# Allegro board DM_SENSOR.brd
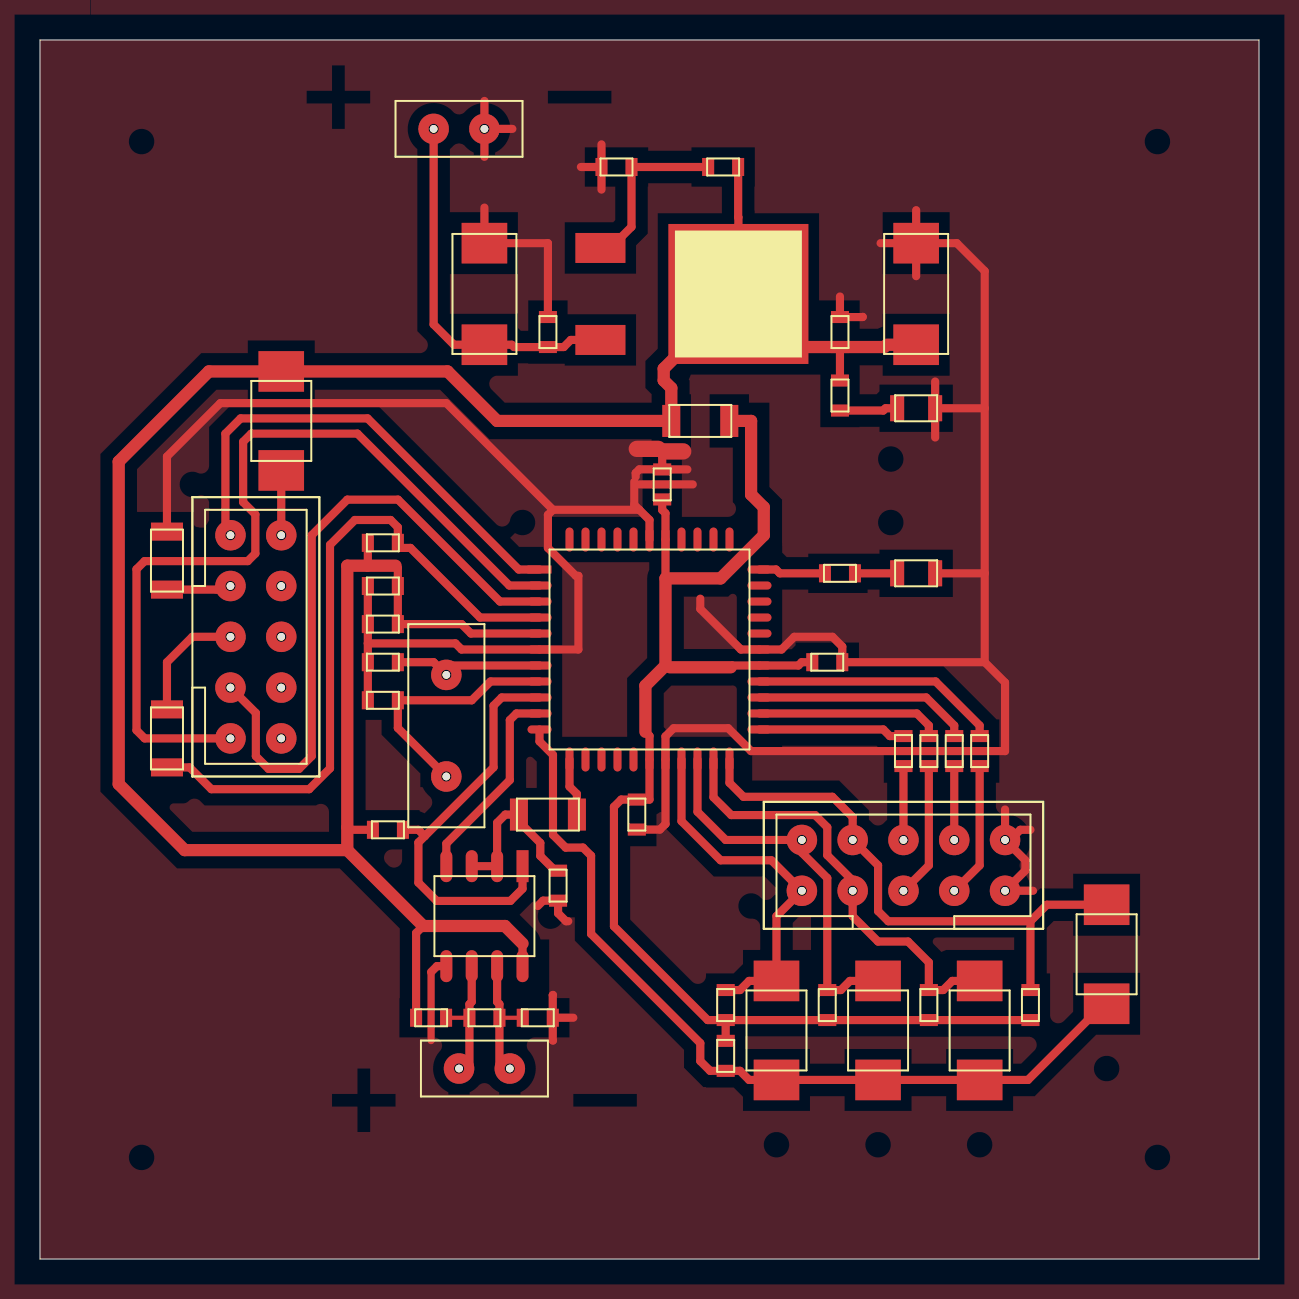
[diagram p0: board, top side]
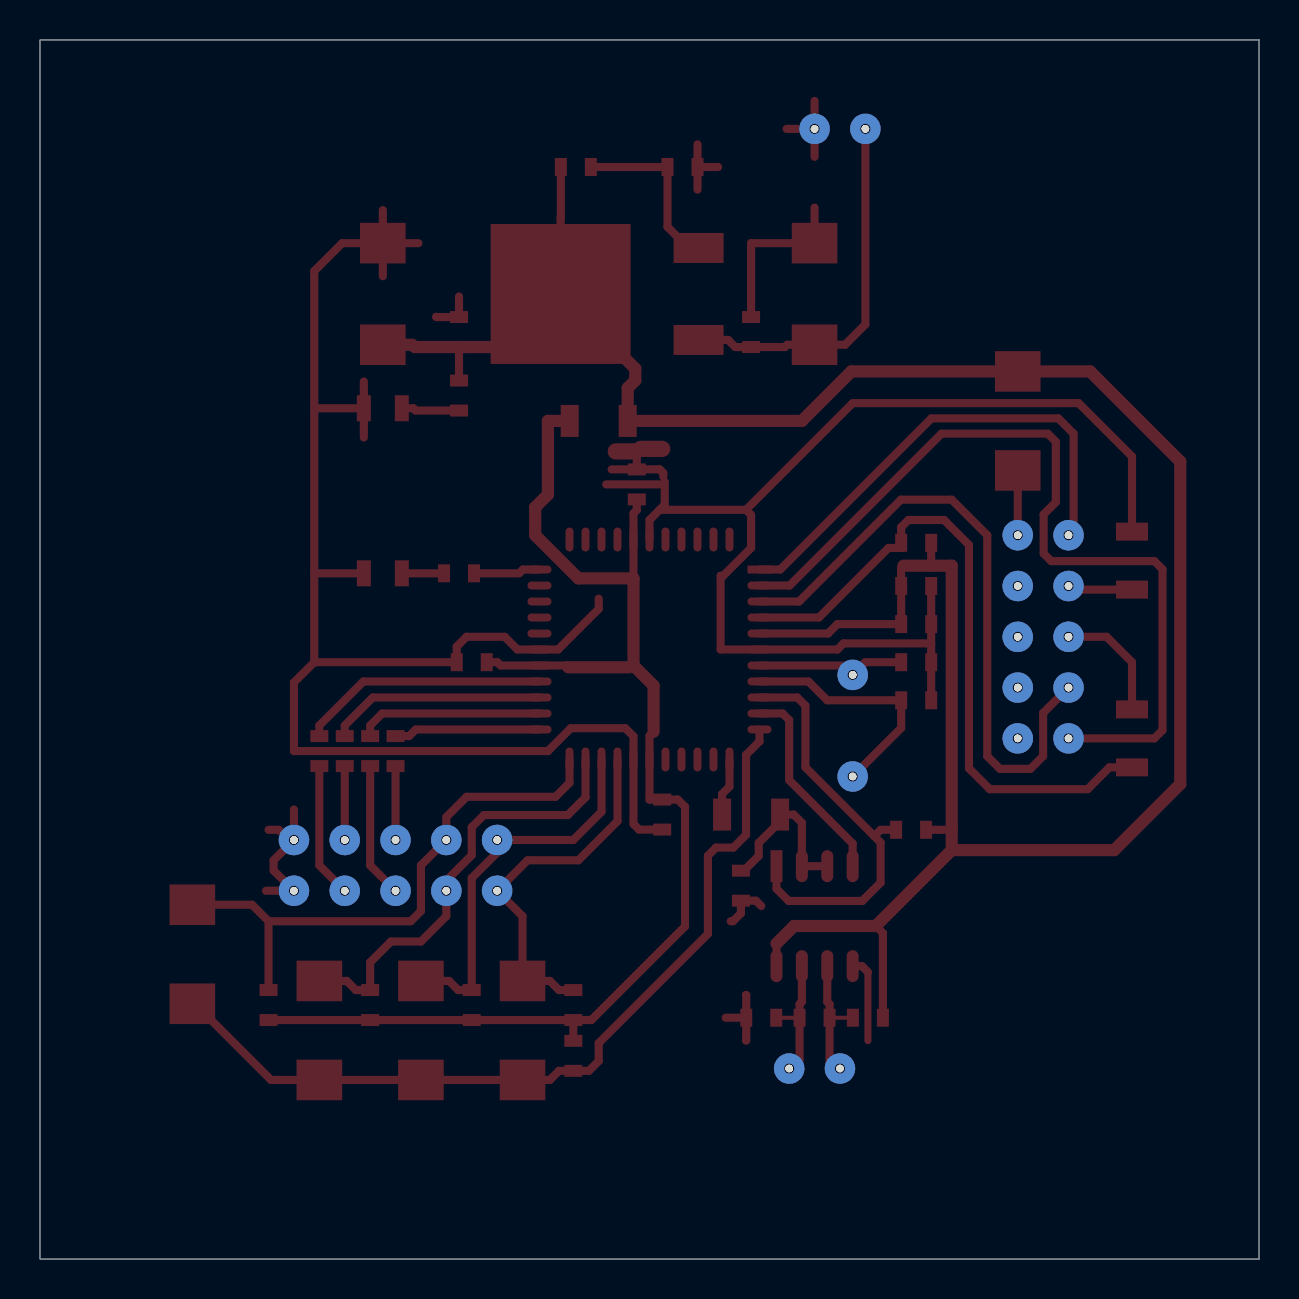
[diagram p1: board, bottom side, seen from below]

Outline 60.96 x 60.96 mm; copper layers: TOP, BOTTOM. Coordinates in mm from the lower left corner of the outline.
Outline path: 0,60.96 0,0 60.96,0 60.96,60.96 0,60.96

## Design rules (mm)
nets with their own width: min track width 0.406; nets GND VCC

## Placement (name value [footprint] x y rotation side)
C1  0.1  [FP_C_SM0603]  25.4 46.35 270 top
C2  4.7x16V  [FP_C_SM_TANTALUM_C]  22.22 48.26 90 top
C3  4.7x16V  [FP_C_SM_TANTALUM_C]  43.81 48.26 90 top
C4  0.1  [FP_C_SM0603]  40 46.35 270 top
C5  24pF  [FP_C_SM0603]  17.14 29.84 0 top
C6  24pF  [FP_C_SM0603]  17.14 27.94 0 top
C7  0.1  [FP_C_SM0603]  17.14 33.65 0 top
C8  0.1  [FP_C_SM0603]  17.14 31.75 0 top
C9  0.1  [FP_C_SM0603]  29.84 22.22 90 top
C10  0.1  [FP_C_SM0603]  39.37 29.84 180 top
C11  0.1  [FP_C_SM0603]  31.11 38.73 270 top
D1  1N4148  [FP_D_1N4148_SM]  12.06 41.91 90 top
D6  1N4148  [FP_D_1N4148_SM]  36.83 11.43 90 top
D7  1N4148  [FP_D_1N4148_SM]  41.91 11.43 90 top
D8  1N4148  [FP_D_1N4148_SM]  46.99 11.43 90 top
D9  1N4148  [FP_D_1N4148_SM]  53.34 15.24 90 top
D10  LED  [FP_D_LED_SM0805]  43.81 42.54 0 top
D11  LED  [FP_D_LED_SM0805]  43.81 34.29 0 top
J1  USBASP  [FP_J_AVR_USB_ASP]  10.79 31.11 0 top
J2  CON10  [FP_J_CON10]  43.18 19.69 90 top
JP2  "485"  [FP_JP_JUMPER_DIP2]  22.22 9.52 90 top
JP3  "POWER"  [FP_JP_JUMPER_DIP2]  20.95 56.51 90 top
PS1  LD1117DTTR  [FP_PS_LD1117DTTR]  34.92 48.26 270 top
R1  180  [FP_R_SM0603]  34.16 54.61 0 top
R2  510  [FP_R_SM0603]  28.83 54.61 180 top
R3  10K  [FP_R_SM0603]  17.14 35.81 180 top
R4  0  [FP_R_SM1206]  25.4 22.22 0 top
R5  10K  [FP_R_SM0603]  34.29 12.7 270 top
R6  10K  [FP_R_SM0603]  39.37 12.7 270 top
R7  10K  [FP_R_SM0603]  44.45 12.7 270 top
R8  10K  [FP_R_SM0603]  49.53 12.7 270 top
R9  680  [FP_R_SM0603]  44.45 25.4 90 top
R10  680  [FP_R_SM0603]  43.18 25.4 90 top
R11  680  [FP_R_SM0603]  46.99 25.4 90 top
R12  680  [FP_R_SM0603]  45.72 25.4 90 top
R13  10K  [FP_R_SM0603]  34.29 10.16 90 top
R14  0  [FP_R_SM1206]  33.02 41.91 0 top
R15  0  [FP_R_SM1206]  6.35 34.92 270 top
R16  0  [FP_R_SM1206]  6.35 26.03 90 top
R17  1K  [FP_R_SM0603]  40 43.18 90 top
R18  1K  [FP_R_SM0603]  40 34.29 180 top
R19  390  [FP_R_SM0603]  19.56 12.06 180 top
R20  220  [FP_R_SM0603]  22.22 12.06 180 top
R21  390  [FP_R_SM0603]  24.89 12.06 180 top
R22  10K  [FP_R_SM0603]  25.91 18.67 270 top
R23  10K  [FP_R_SM0603]  17.4 21.46 180 top
U1  ATMEGA32L-8AU  [FP_U_ATMEGA32L-8AU]  30.48 30.48 0 top
U2  ADM1485ARZ  [FP_U_ADM1485ARZ]  22.22 17.14 270 top
Y1  7.372800 MHz  [FP_Y_CRYSTAL]  20.32 26.67 0 top

## Library data of the parts
C1 C4-C11 = C sm 0603
C2 C3 = C sm tantalum size C
D1 D6-D9 = D 1N4148 sm
D10 D11 = D LED sm 0805
J1 = J AVR USB ASP
J2 = J Connector 10
JP2 JP3 = JP Jumper DIP2
PS1 = PS LD1117DTTR
R1-R3 R5-R13 R17-R23 = R sm 0603
R4 R14-R16 = R sm 1206
U1 = U ATMEGA32L-8AU
U2 = U ADM1485ARZ
Y1 = Y Crystal

## Footprints (pads in the part's own frame, mm; a bottom-side part is the same pattern mirrored in y, then rotated)
FP_C_SM0603
  rect 0.6x0.9 smd: 1(-0.75,0) 2(0.75,0)
FP_C_SM_TANTALUM_C
  rect 2.03x2.28 smd: 1(-2.54,0) 2(2.54,0)
FP_D_1N4148_SM
  rect 2.03x2.28 smd: 1(-2.476,0) 2(2.476,0)
FP_D_LED_SM0805
  rect 0.7x1.3 smd: 1(-0.95,0) 2(0.95,0)
FP_J_AVR_USB_ASP
  custom 1.524x1.524 hole 0.406: 1(-1.27,5.08) 2(1.27,5.08) 3(-1.27,2.54) 4(1.27,2.54) 5(-1.27,0) 6(1.27,0) 7(-1.27,-2.54) 8(1.27,-2.54) 9(-1.27,-5.08) 10(1.27,-5.08)
FP_J_CON10
  custom 1.524x1.524 hole 0.406: 1(-1.27,5.08) 2(1.27,5.08) 3(-1.27,2.54) 4(1.27,2.54) 5(-1.27,0) 6(1.27,0) 7(-1.27,-2.54) 8(1.27,-2.54) 9(-1.27,-5.08) 10(1.27,-5.08)
FP_JP_JUMPER_DIP2
  custom 1.524x1.524 hole 0.406: 1(0,1.27) 2(0,-1.27)
FP_PS_LD1117DTTR
  rect 1.5x2.5 smd: 1(-2.3,-6.9) 3(2.3,-6.9)
  rect 7x7 smd: 4(0,0)
FP_R_SM0603
  rect 0.6x0.9 smd: 1(-0.75,0) 2(0.75,0)
FP_R_SM1206
  rect 0.9x1.6 smd: 1(-1.45,0) 2(1.45,0)
FP_U_ADM1485ARZ
  rect 1.6x0.6 smd: 1(-2.5,1.905)
  oval 1.6x0.6 smd: 2(-2.5,0.635) 3(-2.5,-0.635) 4(-2.5,-1.905) 5(2.5,-1.905) 6(2.5,-0.635) 7(2.5,0.635) 8(2.5,1.905)
FP_U_ATMEGA32L-8AU
  rect 1.2x0.4 smd: 1(-5.5,4)
  oval 1.2x0.4 smd: 2(-5.5,3.2) 3(-5.5,2.4) 4(-5.5,1.6) 5(-5.5,0.8) 6(-5.5,0) 7(-5.5,-0.8) 8(-5.5,-1.6) 9(-5.5,-2.4) 10(-5.5,-3.2) 11(-5.5,-4) 23(5.5,-4) 24(5.5,-3.2) 25(5.5,-2.4) 26(5.5,-1.6) 27(5.5,-0.8) 28(5.5,0) 29(5.5,0.8) 30(5.5,1.6) 31(5.5,2.4) 32(5.5,3.2) 33(5.5,4)
  oval 0.4x1.2 smd: 12(-4,-5.5) 13(-3.2,-5.5) 14(-2.4,-5.5) 15(-1.6,-5.5) 16(-0.8,-5.5) 17(0,-5.5) 18(0.8,-5.5) 19(1.6,-5.5) 20(2.4,-5.5) 21(3.2,-5.5) 22(4,-5.5) 34(4,5.5) 35(3.2,5.5) 36(2.4,5.5) 37(1.6,5.5) 38(0.8,5.5) 39(0,5.5) 40(-0.8,5.5) 41(-1.6,5.5) 42(-2.4,5.5) 43(-3.2,5.5) 44(-4,5.5)
FP_Y_CRYSTAL
  custom 1.524x1.524 hole 0.406: 1(0,2.54) 2(0,-2.54)

## Nets
GND: C1.1 C2.2 C3.2 C4.1 C5.1 C6.1 C7.1 C8.1 C9.1 C10.1 C11.1 D10.2(CATHODE) D11.2(CATHODE) J1.3(GND#3) J1.4(GND#4) J1.6(GND#6) J1.8(GND#8) J1.10(GND#10) J2.9 J2.10 JP3.2 R2.2 R15.1 R15.2 R21.1 R22.2 U1.6(GND#6) U1.18(GND#18) U1.28(GND#28) U1.39(GND#39) U2.5(GND)
VCC: C3.1 C4.2 C7.2 C8.2 C9.2 C10.2 C11.2 D1.2(CATHODE) PS1.4(OUT) R1.2 R3.2 R5.2 R6.2 R7.2 R8.2 R13.2 R14.1 R14.2 R17.2 R19.2 R23.2 U1.5(VCC#5) U1.17(VCC#17) U1.27(AVCC) U1.38(VCC#38) U2.8(VCC)
VIN: C1.2 C2.1 JP3.1 PS1.3(IN)
A: JP2.1 R19.1 R20.2 U2.6(A)
AREF: U1.29(AREF)
B: JP2.2 R20.1 R21.2 U2.7(B)
BOARD_LED: R18.2 U1.33(PA4 (ADC4))
BUT0: D6.2(CATHODE) J2.1 R5.1 U1.19(PC0 (SCL))
BUT1: D7.2(CATHODE) J2.2 R6.1 U1.20(PC1 (SDA))
BUT2: D8.2(CATHODE) J2.3 R7.1 U1.21(PC2 (TCK))
BUT3: D9.2(CATHODE) J2.4 R8.1 U1.22(PC3 (TMS))
INT0: D6.1(ANODE) D7.1(ANODE) D8.1(ANODE) D9.1(ANODE) R13.1 U1.11(PD2 (INT0))
LED0: R9.2 U1.24(PC5 (TDI))
LED1: R10.2 U1.23(PC4 (TDO))
LED2: R11.2 U1.26(PC7 (TOSC2))
LED3: R12.2 U1.25(PC6 (TOSC1))
MISO: J1.9(MISO) U1.2(PB6 (MISO))
MOSI: J1.1(MOSI) U1.1(PB5 (MOSI))
NREDE: R4.2 U1.12(PD3 (INT1))
NRST: J1.5(RESET) R3.1 R16.1 R16.2 U1.4(NRESET)
PB0 (XCK/T0): U1.40(PB0 (XCK/T0))
PB1 (T1): U1.41(PB1 (T1))
PB2 (AIN0/INT2): U1.42(PB2 (AIN0/INT2))
PB3 (AIN1/OC0): U1.43(PB3 (AIN1/OC0))
PB4 (NSS): U1.44(PB4 (NSS))
RXD: R23.1 U1.9(PD0 (RXD)) U2.1(RO)
SCK: J1.7(SCK) U1.3(PB7 (SCK))
TXD: U1.10(PD1 (TXD)) U2.4(DI)
XTAL1: C6.2 U1.8(XTAL1) Y1.2
XTAL2: C5.2 U1.7(XTAL2) Y1.1
N06039: R4.1 R22.1 U2.2(NRE) U2.3(DE)
N07188: D1.1(ANODE) J1.2(VCC)
N12106: J2.5 R9.1
N12110: J2.6 R10.1
N12114: J2.7 R11.1
N12118: J2.8 R12.1
N22855: D10.1(ANODE) R17.1
N23161: D11.1(ANODE) R18.1
N27727: PS1.1(ADJ) R1.1 R2.1

Pads without a net: U1 13 14 15 16 30 31 32 34 35 36 37

## Routing (per net, layer and track width the routed paths; a pad name or vN(x,y) marks a point on that pad's centre or on a via; arc(x,y) is an arc through that point)
GND: length 183.5
  TOP w0.356: 19.56,10.92 19.56,14.35
  TOP w0.406: 25.65,10.92 25.64,10.93 R21.1 ; 25.65,37.46 29.97,37.46 ; 25.65,37.46 20.32,42.8 9.02,42.8 6.35,40.13 R15.1 ; 25.65,37.46 25.4,37.21 25.4,35.56 26.8,34.16 26.92,34.16 26.92,30.48 U1.6 21.08,30.48 20.78,30.78 16.39,30.78 ; 29.97,37.46 30.48,36.96 U1.39 ; 29.97,37.46 29.72,37.72 29.72,38.87 ; D10.2 44.76,41.08 ; D10.2 44.76,43.88 ; D10.2 47.24,42.54 ; 16.39,30.78 C5.1 C6.1 ; 16.39,30.78 C8.1 C7.1 ; R21.1 25.64,13.2 25.65,13.21 ; R21.1 26.67,12.06 ; 26.42,16.89 26.31,16.89 25.91,17.29 R22.2 25.16,17.92 24.89,17.65 ; 31.11,39.64 C11.1 ; 31.11,39.64 30.96,39.49 ; 31.11,39.64 31.27,39.49 ; 31.11,39.64 31.11,40.31 30.91,40.51 ; C11.1 31.27,39.49 ; C11.1 30.96,39.49 ; 47.24,42.54 47.24,49.4 45.85,50.8 C3.2 ; 47.24,42.54 47.24,34.29 ; C9.1 31,21.47 31.28,21.76 U1.18 31.28,26.14 31.69,26.54 34.42,26.54 35.56,25.4 48.26,25.4 48.26,28.83 47.24,29.84 ; R15.2 8.84,33.47 9.02,33.65 ; 48.64,18.8 49.28,19.43 49.28,19.94 48.64,20.57 ; 30.96,39.49 30.96,39.49 29.97,39.49 29.79,39.31 29.79,39.12 ; R2.2 28.08,55.74 ; R2.2 27.05,54.61 ; R2.2 28.08,53.48 ; 47.24,34.29 D11.2 ; 47.24,34.29 47.24,29.84 ; C3.2 42.04,50.8 ; C3.2 43.81,49.15 ; C3.2 43.81,52.45 ; 40,48.13 C4.1 41.14,47.11 41.15,47.12 ; 22.22,57.02 22.22,57.91 ; 22.22,52.58 C2.2 25.4,50.8 C1.1 ; 31.27,39.49 32.37,39.49 ; 33.02,33.02 33.02,32.51 35.05,30.48 U1.28 37.08,30.48 37.72,31.11 39.63,31.11 40.12,30.63 C10.1 47.24,29.84 ; U2.5 19.85,14.64 19.56,14.35 ; 22.73,56.51 23.62,56.51 ; 48.77,18.41 49.66,18.41 ; 48.77,21.21 49.02,21.46 49.53,21.46 ; 48.26,21.46 48.26,22.48 ; 29.97,38.73 32.64,38.73 ; 22.22,56.01 22.22,55.12
  TOP w0.813: 29.84,40.51 30.91,40.51 ; 31.19,40.39 32.17,40.39
VCC: length 199.2
  TOP w0.406: 31.5,29.59 31.41,29.68 31.28,29.68 31.28,29.68 ; R5.2 R13.2 ; R5.2 33.39,11.95 28.7,16.64 28.7,22.61 29.06,22.98 C9.2 30.48,22.98 U1.17 30.48,26.16 30.28,26.37 ; R5.2 R6.2 R7.2 R8.2 ; 17.78,34.67 17.9,34.56 C7.2 C8.2 21.08,31.75 21.55,31.28 U1.5 ; U2.8 24.13,15.78 ; 19.16,16.65 18.81,16.3 R19.2 ; 16.38,34.67 16.39,34.68 R3.2 ; C4.2 R17.2 ; 34.54,29.59 34.63,29.68 U1.27 37.93,29.68 38.09,29.84 C10.2 ; 37.58,45.6 PS1.4 34.92,52.09 34.91,52.1 R1.2 ; C11.2 31.11,37.46 31.28,37.29 U1.38 31.28,34.04 ; 42.34,45.72 42.23,45.6 ; 15.37,21.59 15.49,21.46 R23.2
  TOP w0.61: 30.28,26.37 30.28,28.67 31.28,29.68 ; 24.13,15.78 23.25,16.65 19.16,16.65 15.37,20.45 ; 15.37,20.45 15.37,34.67 17.78,34.67 ; 15.37,20.45 7.24,20.45 3.94,23.75 3.94,39.88 8.44,44.39 D1.2 20.38,44.39 22.86,41.91 R14.1 31.57,43.56 31.19,43.94 31.19,44.53 PS1.4 ; 37.58,45.6 C4.2 42.23,45.6 ; 34.54,29.59 31.5,29.59 ; C3.1 42.34,45.72 ; 31.28,29.68 31.28,34.04 34.04,34.04 36.19,36.19 36.19,37.59 35.56,38.23 35.56,41.91 R14.2
VIN: length 18.2
  TOP w0.406: PS1.3 26.55,45.96 26.19,45.6 C1.2 23.71,45.6 23.59,45.72 C2.1 20.7,45.72 19.68,46.74 19.68,56.01
A: length 6.1
  TOP w0.203: R19.1 R20.2
  TOP w0.406: U2.6 21.59,12.86 21.47,12.74 R20.2 21.47,9.73
B: length 6.1
  TOP w0.203: R20.1 R21.2
  TOP w0.406: U2.7 22.86,12.86 22.98,12.74 R20.1 22.98,9.73
BOARD_LED: length 3.4
  TOP w0.406: R18.2 37,34.29 36.81,34.48 U1.33
BUT0: length 17.2
  TOP w0.406: 37.72,18.8 36.58,19.94 34.04,19.94 32.08,21.9 U1.19 ; R5.1 35.01,13.45 35.46,13.91 D6.2 36.83,17.14 37.72,18.03
BUT1: length 18.2
  TOP w0.406: U1.20 32.88,22.36 34.29,20.95 37.59,20.95 ; D7.2 40.5,13.91 40.05,13.45 R6.1 39.37,19.05 38.1,20.32 38.1,20.45
BUT2: length 21
  TOP w0.406: D8.2 45.62,13.91 45.17,13.45 R7.1 44.45,14.83 43.41,15.88 41.91,15.88 40.64,17.14 40.64,17.91 ; 40.64,18.92 39.37,20.19 39.37,21.59 38.76,22.2 34.57,22.2 33.68,23.09 U1.21
BUT3: length 27.6
  TOP w0.406: U1.22 34.48,23.81 35.18,23.11 39.62,23.11 40.64,22.1 40.64,21.46 ; 49.53,16.89 42.42,16.89 41.91,17.4 41.91,19.69 41.02,20.57 ; 49.53,16.89 R8.1 ; 49.53,16.89 50.35,17.72 D9.2
INT0: length 42.7
  TOP w0.406: D9.1 53.22,12.76 49.41,8.95 D8.1 D7.1 D6.1 35.46,8.95 35.01,9.41 R13.1 33.51,9.41 33.02,9.9 33.02,10.79 27.56,16.26 27.56,20.17 27.15,20.57 26.29,20.57 25.65,21.21 25.65,25.21 24.98,25.88 U1.11
LED0: length 9.2
  TOP w0.406: U1.24 43.85,27.28 44.45,26.68 R9.2
LED1: length 7.3
  TOP w0.406: R10.2 42.5,26.15 42.17,26.48 U1.23
LED2: length 12.5
  TOP w0.406: U1.26 44.79,28.88 46.99,26.68 R11.2
LED3: length 10.8
  TOP w0.406: R12.2 45.72,26.68 44.32,28.08 U1.25
MISO: length 42.7
  TOP w0.406: 9.02,26.03 5.23,26.03 4.83,26.44 4.83,34.49 5.23,34.9 10.39,34.9 10.77,35.28 10.77,37.24 10.16,37.85 10.16,40.87 10.57,41.27 15.88,41.27 23.47,33.68 U1.2
MOSI: length 23.9
  TOP w0.406: U1.1 23.94,34.48 16.38,42.04 10.03,42.04 9.27,41.27 9.27,36.58
NREDE: length 2.9
  TOP w0.406: R4.2 26.85,23.25 26.48,23.62 U1.12
NRST: length 39.4
  TOP w0.406: U1.4 22.01,32.08 18.53,35.56 17.9,35.56 R3.1 17.9,36.59 17.53,36.96 15.75,36.96 14.5,35.71 14.5,24.54 13.46,23.5 8.57,23.5 7.48,24.58 R16.1 ; 9.02,31.11 7.62,31.11 6.35,29.84 R16.2
RXD: length 21.1
  TOP w0.406: R23.1 18.92,21.46 19.24,21.15 ; U2.1 24.13,18.51 23.52,17.91 19.84,17.91 18.92,18.82 18.92,20.83 19.24,21.15 ; U1.9 23.09,28.08 22.68,27.67 22.68,24.59 19.24,21.15
SCK: length 32
  TOP w0.406: 9.91,28.19 10.79,27.3 10.79,25.15 11.43,24.51 12.95,24.51 13.59,25.15 13.59,36.19 15.37,37.97 17.91,37.97 23,32.88 U1.3
TXD: length 10.2
  TOP w0.406: U1.10 23.83,27.28 23.49,26.95 23.49,23.95 20.32,20.78 U2.4
XTAL1: length 11.7
  TOP w0.406: U1.8 22.53,28.88 21.59,27.94 C6.2 17.9,26.55 19.94,24.51
XTAL2: length 6.4
  TOP w0.406: 19.94,29.59 19.68,29.84 C5.2 ; U1.7 20.73,29.68
N06039: length 8.4
  TOP w0.203: 25.76,19.42 R22.1 ; R4.1 23.95,21.87
  TOP w0.406: U2.3 U2.2 22.86,21.81 23.27,22.22 R4.1 ; 23.95,21.87 25.02,20.81 25.02,20.16 25.76,19.42
N07188: length 2.7
  TOP w0.406: 12.06,36.7 D1.1
N12106: length 6.2
  TOP w0.406: R9.1 44.45,19.69 43.56,18.8
N12110: length 3.2
  TOP w0.406: 43.18,21.46 R10.1
N12114: length 6.2
  TOP w0.406: 46.1,18.8 46.99,19.69 R11.1
N12118: length 3.2
  TOP w0.406: 45.72,21.46 R12.1
N22855: length 2.9
  TOP w0.406: R17.1 42.17,42.43 42.29,42.54 D10.1
N23161: length 2.1
  TOP w0.406: R18.1 D11.1
N27727: length 8.8
  TOP w0.406: PS1.1 28.53,50.56 29.58,51.61 R2.1 R1.1

## Copper pours and planes (outline as drawn; the poured copper is in the pictures)
GND on TOP: 60.96,60.96 60.96,0 0,0 0,60.96 ; 31 cut-outs
Net_2 on TOP: 2.54,62.23 62.23,62.23 62.23,-1.27 -1.27,-1.27 -1.27,62.23 2.51,62.23 2.51,63.5 -2.54,63.5 -2.54,-2.54 63.5,-2.54 63.5,63.5 2.54,63.5
